# Altium PCB Pannel3.5x3.PcbDoc (part 2 of 4)
Units mil, origin at the board's own origin, x right, y up, seen from the top; angles counter-clockwise.
Board outline 3543.31 x 2771.65 mil, 4 copper layers (SIGNAL, GROUND, PWR, SIGNAL (Bottom)), stack 61.627 mil thick; 234 components, 186 nets, 894 pads, 439 vias.
Unrouted connection lines stored in the file: 4.
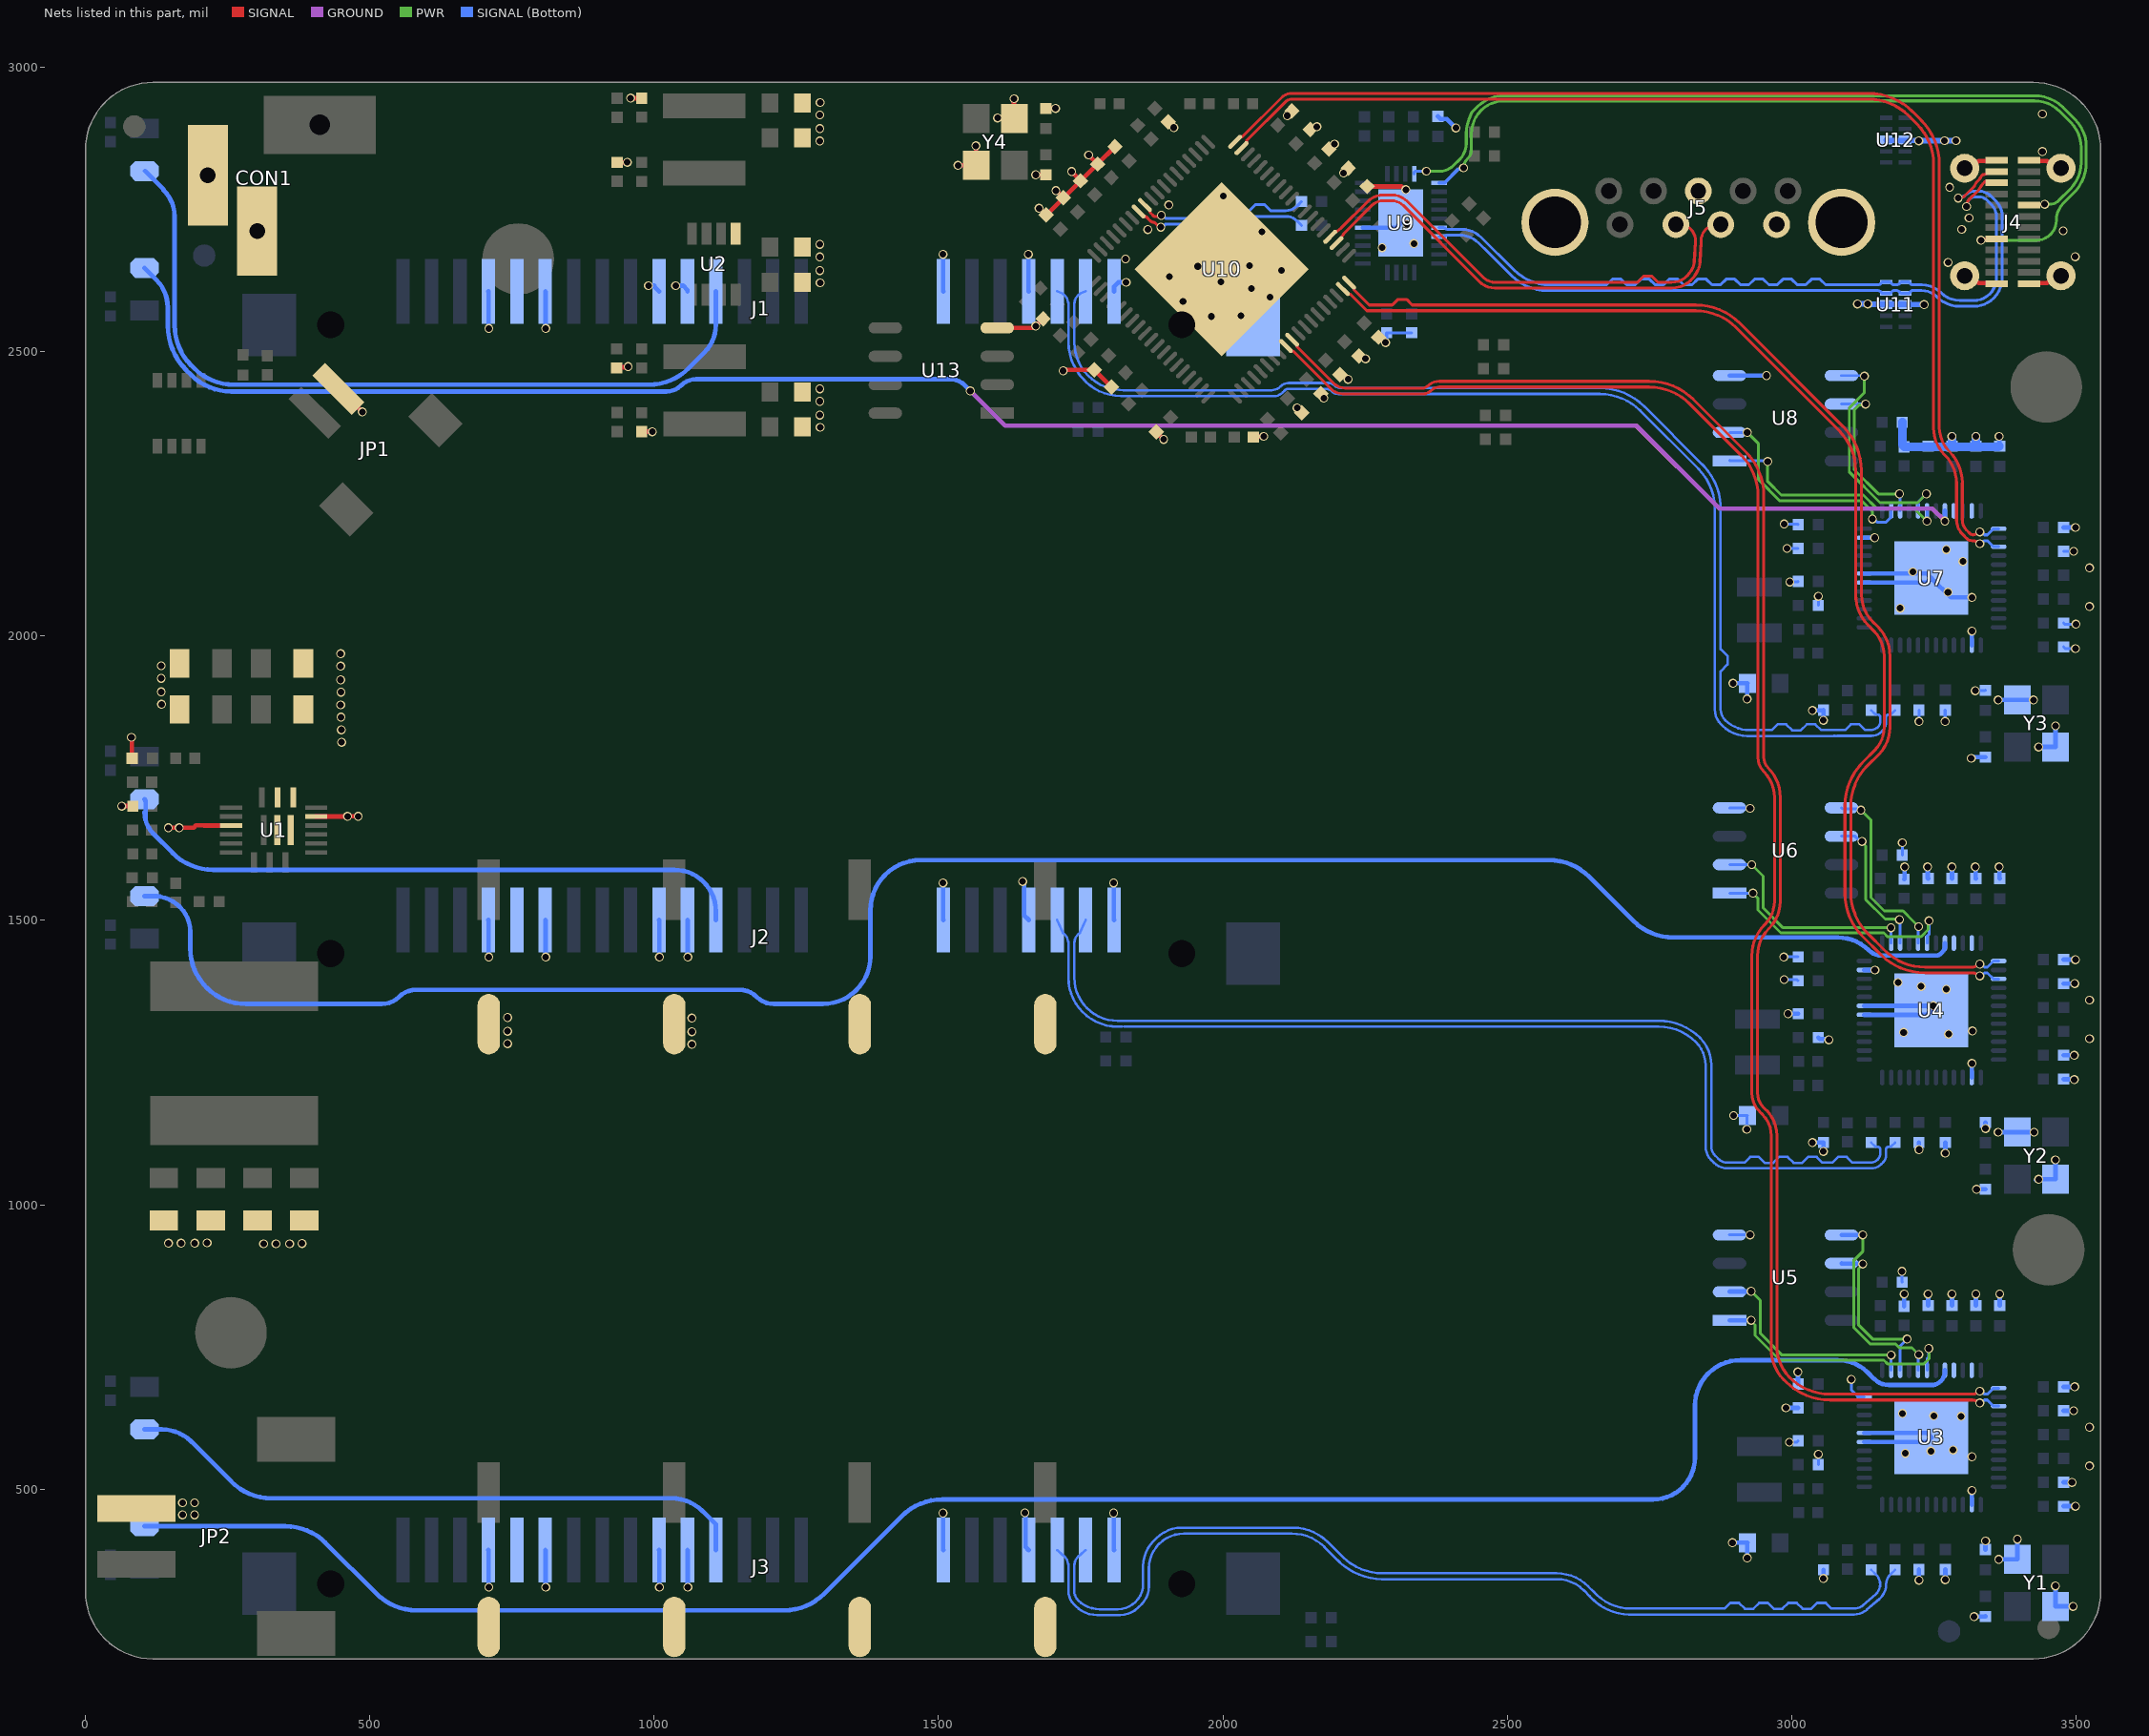
[diagram p4: the nets of this part, all layers, seen from the top]

## Via types
v1: diameter 15.75, hole 11.81, SIGNAL to SIGNAL (Bottom), tented both sides, 439 vias

## Nets (pads, with @x,y where several pads share a name; then routed paths per layer and width w, separated by ;. In a path a pad name is that pad's centre, name@x,y a point inside that pad or via, vN(x,y) a via of type N, cw(c..) or ccw(c..) an arc to the next point about the centre after c; other vN are vias at no path point) (continued)
cap_SSTX_N: C101.2 U10.49 | length 306.6
  SIGNAL w5.1: U10.49@1863.01,2757.78 U10.49@1870.47,2750.33 ; U10.49@1870.48,2750.32 cw(c1867.03,2746.89) 1871.9,2746.89 ccw(c1876.76,2746.89) 1873.31,2743.45 1877.74,2739.03 ; 1877.74,2739.02 ccw(c1881.34,2742.63) 1881.34,2737.53 1883.46,2737.53 1883.62,2737.7 1886.85,2737.7 ccw(c1886.85,2744.65) v1(1891.77,2739.73)
  SIGNAL (Bottom) w5.1: v1(1891.77,2739.73) 1894.37,2739.73 1900.08,2734.03 1959.85,2734.03 ccw(c1959.85,2757.96) 1976.77,2741.04 1976.83,2741.09 cw(c1993.62,2724.3) 1976.87,2741.13 cw(c1993.62,2724.3) 1993.62,2748.05 2032,2748.05 2047,2748.05 2057.93,2758.98 2072.93,2758.98 2083.85,2748.05 2107,2748.05 2110.73,2748.05 ccw(c2110.73,2776.1) 2130.99,2756.71 C101.2@2138.28,2764
cap_SSTX_P: C100.2 U10.50 | length 308.2
  SIGNAL w5.1: U10.50@1851.84,2746.61 1859.3,2739.15 ccw(c1862.74,2742.59) 1862.74,2737.73 cw(c1862.74,2732.86) 1866.17,2736.31 ; 1866.18,2736.3 1872.29,2730.19 ccw(c1875.87,2733.82) 1873.72,2729.2 1874.41,2728.88 cw(c1867.95,2714.87) 1875.89,2728.09 ccw(c1878.47,2732.49) 1876.83,2727.66 1877.5,2727.43 cw(c1877.5,2721.51) 1881.7,2725.7 1886.55,2720.84 ccw(c1891,2725.29) v1(1891,2719)
  SIGNAL (Bottom) w5.1: v1(1891,2719) 1893.88,2719 1898.81,2723.93 1964.03,2723.93 ccw(c1964.03,2747.86) 1980.96,2730.94 1983.91,2733.9 ; 1983.93,2733.91 cw(c1993.7,2724.11) 1993.7,2737.95 2110.73,2737.95 cw(c2110.73,2709.9) C100.2@2130.96,2729.32 ; C100.2@2130.99,2729.29 C100.2@2138.28,2722
cap_TX1_N: C23.1 J3.S3 | length 1734.9
  SIGNAL (Bottom) w4.29: J3.S3@1708.71,392.86 1718.37,384.28 cw(c1704.97,364.86) 1728.56,364.86 1728.56,321.14 ccw(c1762.45,321.14) 1738.43,297.23 1741.47,294.2 ccw(c1778.87,331.61) 1778.87,278.71 1819.59,278.71 ccw(c1819.59,323.09) 1850.97,291.71 1857,297.74 ccw(c1825.62,329.12) 1870,329.12 1870,360.54 cw(c1931.46,360.54) 1887.97,403.97 ; 1888.03,404.03 cw(c1931.46,360.54) 1931.46,422 2120.95,422 cw(c2120.95,339.95) 2178.32,398.61 cw(c2120.95,339.95) 2178.97,397.97 2202.38,374.81 2203.94,373.25 ccw(c2279.74,449.05) 2205.59,371.64 ccw(c2279.74,449.05) 2279.74,341.85 2586.51,341.86 cw(c2586.51,272.51) 2634.99,322.09 cw(c2586.51,272.51) 2635.54,321.55 2645.14,312.06 2651.85,305.35 ccw(c2713.74,367.24) 2654.44,302.86 ccw(c2713.74,367.24) 2713.74,279.71 3110.08,279.71 ccw(c3110.08,313.6) 3132.22,287.95 3154.4,307.09 ccw(c3132.26,332.74) 3166.15,332.74 cw(c3189.74,332.74) 3174.3,350.59 C23.1@3182,358.28
cap_TX1_P: C20.1 J3.S2 | length 1736
  SIGNAL (Bottom) w4.29: J3.S2@1758.71,392.86 1749.04,384.28 ccw(c1762.45,364.86) 1738.85,364.86 1738.85,321.14 ccw(c1762.45,321.14) 1745.73,304.49 ccw(c1783.13,341.9) 1783.13,289 1815.33,289 ccw(c1815.33,333.38) 1846.71,302 ccw(c1815.33,333.38) 1859.71,333.38 1859.71,364.81 cw(c1921.17,364.81) 1877.68,408.23 1883.35,413.91 cw(c1927.74,369.52) 1927.74,432.29 2123.26,432.29 cw(c2123.26,345.54) 2183.15,408.3 cw(c2123.26,345.54) 2184.61,406.88 2186.2,405.28 2209.62,382.12 2210.31,381.43 ccw(c2281.02,452.14) 2211.53,380.24 ccw(c2281.02,452.14) 2281.02,352.14 2586.68,352.14 cw(c2586.68,272.94) 2641.98,329.65 cw(c2586.68,272.94) 2642.69,328.95 2642.77,328.86 2652.37,319.37 2656.11,315.64 ccw(c2718,377.53) 2658.14,313.67 ccw(c2718,377.53) 2718,290 2865,290 2882.43,290 2892.43,300 2907.43,300 2917.86,289.57 2932.86,289.57 2943.28,300 2958.28,300 2968.71,289.57 2983.71,289.57 2994.14,300 3009.14,300 3019.57,289.57 3034.57,289.57 3045,300 3060,300 3070,290 3085,290 3110.08,290 ccw(c3110.08,313.6) 3125.5,295.73 3147.68,314.88 ccw(c3132.26,332.74) C20.1@3147.72,350.57 ; C20.1@3140,358.28 C20.1@3147.7,350.59
cap_TX2_N: C22.1 J2.S3 | length 1832.5
  SIGNAL (Bottom) w4.29: J2.S3@1708.71,1500.84 1718.37,1478.47 cw(c1704.97,1459.05) 1728.56,1459.05 1728.56,1399.4 ccw(c1814.3,1399.4) 1753.67,1338.77 1753.77,1338.67 ccw(c1815.17,1400.07) 1815.17,1313.24 1822.74,1313.24 ; 1826.97,1313.24 2766.23,1313.24 cw(c2766.23,1220.23) 2832,1286 cw(c2791.59,1245.59) 2848.74,1245.59 2848.74,1102.75 ccw(c2882.62,1102.75) 2858.61,1078.84 2863.57,1073.88 ccw(c2887.49,1097.88) 2887.49,1064 3139.27,1064 ccw(c3139.27,1090.8) 3158.23,1071.85 3161.26,1074.88 ccw(c3149.46,1086.67) 3166.15,1086.67 3166.15,1097.58 cw(c3170.44,1097.58) 3167.4,1100.61 cw(c3170.44,1097.58) 3170.44,1101.87 3171.48,1101.87 ccw(c3171.48,1108.68) 3176.29,1103.86 C22.1@3182,1109.57
cap_TX2_P: C19.1 J2.S2 | length 1837.9
  SIGNAL (Bottom) w4.29: J2.S2@1758.71,1500.84 1749.04,1478.47 ccw(c1762.45,1459.05) 1738.85,1459.05 1738.85,1399.47 ccw(c1814.47,1399.47) 1761,1346 ccw(c1815.24,1400.24) 1815.24,1323.53 2766.33,1323.53 cw(c2766.33,1220.48) 2839.2,1293.35 2839.39,1293.17 cw(c2791.96,1245.74) 2859.03,1245.74 2859.03,1102.75 ccw(c2882.62,1102.75) 2865.9,1086.1 2870.84,1081.16 ccw(c2887.49,1097.88) 2887.49,1074.29 2892,1074.29 2917.28,1074.29 2927.28,1084.29 2942.28,1084.29 2952.71,1073.86 2967.71,1073.86 2978.14,1084.29 2993.14,1084.29 3003.57,1073.86 3018.57,1073.86 3029,1084.29 3044,1084.29 3054,1074.29 3072,1074.29 3082,1084.29 3097,1084.29 3107,1074.29 3122,1074.29 3139.23,1074.29 ccw(c3139.23,1090.91) 3150.97,1079.14 3151.06,1079.23 ccw(c3139.49,1090.8) 3155.86,1090.8 3155.86,1097.58 ccw(c3151.56,1097.58) 3154.6,1100.61 ccw(c3151.57,1097.58) 3151.57,1101.87 3150.52,1101.87 cw(c3150.52,1108.68) 3145.71,1103.86 C19.1@3140,1109.57
cap_TX3_N: C21.1 J1.S3 | length 2116.6
  SIGNAL (Bottom) w4.29: J1.S3@1708.71,2606.09 1718.37,2602.1 cw(c1704.97,2582.69) 1728.56,2582.69 1728.56,2516.23 ccw(c1821.13,2516.23) 1755.67,2450.77 1758.74,2447.71 ccw(c1820.88,2509.85) 1820.88,2421.97 2089.96,2421.97 ccw(c2089.96,2443.72) 2105.34,2428.34 2108.35,2431.35 cw(c2116.46,2423.25) 2116.46,2434.71 2181.22,2434.71 cw(c2181.22,2419.35) 2192.08,2430.21 ccw(c2202.94,2441.07) 2202.94,2425.71 2663.07,2425.71 cw(c2663.07,2325.71) 2733.78,2396.42 2835.71,2294.49 cw(c2765,2223.78) 2836.82,2293.36 cw(c2765,2223.78) 2864.11,2237.09 cw(c2765,2223.78) 2865,2223.78 2865,1870.93 ccw(c2901.26,1870.93) 2875.62,1845.28 2878.69,1842.22 ccw(c2921.95,1885.49) 2921.95,1824.3 3074.74,1824.3 3074.94,1824.51 3076.08,1824.51 cw(c3076.05,1820.21) 3076.43,1824.49 3078.09,1824.34 ccw(c3079,1834.59) 3079,1824.3 ccw(c3079,1834.59) 3080.73,1824.45 cw(c3081.44,1820.22) 3081.44,1824.51 3139.51,1824.51 ccw(c3139.51,1852.39) 3139.8,1824.51 ccw(c3139.51,1852.39) 3159.22,1832.67 ; 3159.33,1832.77 ccw(c3142.87,1849.24) 3166.14,1849.24 3166.15,1857.58 cw(c3170.44,1857.58) 3167.4,1860.61 cw(c3170.44,1857.58) 3170.44,1861.87 3171.48,1861.87 ccw(c3171.48,1868.68) 3176.29,1863.86 C21.1@3182,1869.57
cap_TX3_P: C18.1 J1.S2 | length 2118.6
  SIGNAL (Bottom) w4.29: J1.S2@1758.71,2606.09 1749.04,2602.1 ccw(c1762.45,2582.69) 1738.85,2582.69 1738.85,2516.3 ccw(c1821.3,2516.3) 1763,2458 ccw(c1825.14,2520.14) 1803.83,2434.88 ccw(c1825.14,2520.14) 1825.14,2432.26 2085.7,2432.26 ccw(c2085.7,2454.01) 2101.08,2438.63 cw(c2116.42,2423.34) 2101.15,2438.7 cw(c2116.42,2423.34) 2116.42,2445 2185.48,2445 cw(c2185.48,2429.64) 2196.34,2440.5 ccw(c2207.21,2451.36) 2207.21,2436 2663.12,2436 cw(c2663.12,2325.82) 2741.03,2403.73 2843.02,2301.74 ; 2843.04,2301.72 cw(c2765.11,2223.83) 2846.35,2298.26 cw(c2765.11,2223.83) 2874.23,2239.09 cw(c2765.11,2223.83) 2875.29,2223.83 2875.29,2015 2875.29,1977 2887.29,1965 2887.29,1950 2875.29,1938 2875.29,1923 2875.29,1871 ccw(c2901.43,1871) 2882.95,1852.51 ccw(c2926.21,1895.78) 2913.02,1836.03 ccw(c2926.21,1895.78) 2926.21,1834.59 2933,1834.59 2965.32,1834.59 2975.53,1844.8 2990.53,1844.8 3001.16,1834.16 3016.16,1834.16 3026.8,1844.8 3041.8,1844.8 3052,1834.59 3079,1834.59 3079,1834.8 3094.35,1834.8 3104.35,1844.8 3119.35,1844.8 3129.35,1834.8 3139.43,1834.8 ccw(c3139.43,1852.57) 3144.3,1835.47 ccw(c3139.43,1852.57) 3151.79,1839.8 ccw(c3139.43,1852.57) 3152,1840 ccw(c3142.69,1849.31) 3155.86,1849.31 3155.86,1857.58 ccw(c3151.56,1857.58) 3154.6,1860.61 ccw(c3151.57,1857.58) 3151.57,1861.87 3150.52,1861.87 cw(c3150.52,1868.68) 3145.71,1863.86 C18.1@3140,1869.57
DAS1: J3.P11
DAS2: J2.P11
DAS3: J1.P11
GND: C3.1 C4.1 C5.1 C6.1 C7.1 C8.1 C9.1 C10.1 C11.1 C12.1 C13.1 C14.1 C15.1 C16.1 C17.1 C30.1 C31.1 C32.1 C33.1 C34.1 C35.1 C38.1 C39.1 C40.1 C41.1 C42.1 C43.1 C44.1 C45.1 C46.1 C47.1 C48.1 C49.1 C50.1 C51.1 C52.1 C53.1 C54.1 C55.1 C56.1 C57.1 C58.1 C59.1 C60.1 C61.1 C62.1 C63.1 C64.1 C65.1 C70.2 C71.2 C72.2 C73.2 C74.1 C75.1 C76.1 C78.1 C79.1 C80.1 C81.1 C82.1 C83.1 C84.1 C85.1 C86.1 C87.1 C88.1 C89.1 C90.1 C91.1 C94.2 C95.2 C96.1 C97.2 C108.2 C109.2 C110.1 C111.1 C112.1 C113.1 C114.1 C115.1 C116.1 C117.1 C118.1 C119.1 C120.1 C121.1 C122.1 C123.1 C124.1 C125.1 C126.1 CON1.2 CON1.3 E1.2 E2.2 E3.2 E4.2 E5.2 E6.2 E7.2 E8.2 J1.P5 J1.P6 J1.P10 J1.P12 J1.S1 J1.S4 J1.S7 J1.SH1 J2.P5 J2.P6 J2.P10 J2.P12 J2.S1 J2.S4 J2.S7 J3.P5 J3.P6 J3.P10 J3.P12 J3.S1 J3.S4 J3.S7 J4.A1 J4.A12 J4.B1 J4.B12 J4.SH1 J4.SH2 J4.SH3 J4.SH4 J5.4 J5.7 J5.10 J5.11 JP1.2 JP2.2 R7.1 R12.2 R13.2 R16.2 R17.2 R30.1 R31.1 R36.1 R44.2 R46.1 R47.1 R49.2 R53.2 U1.8 U1.10 U1.11 U1.15 U1.20 U1.21 U2.5 U3.26 U3.42 U3.43 U3.47 U3.49 U4.26 U4.42 U4.43 U4.47 U4.49 U5.4 U6.4 U7.26 U7.42 U7.43 U7.47 U7.49 U8.4 U9.19 U9.29 U10.77 U11.3 U11.8 U12.3 U12.8 U13.4 Y1.2 Y1.4 Y2.2 Y2.4 Y3.2 Y3.4 Y4.2 Y4.4 | length 6094.1
  SIGNAL w8: v1(64,1701) R7.1@83.52,1701 ; v1(81,1822) 81.7,1821.3 81.7,1785.7 C11.1@82.41,1785 ; v1(146,1663) 146.13,1662.87 165,1662.87 v1(165.13,1662.74) 165.55,1663.17 190.45,1663.17 194.45,1667.17 208.43,1667.17 208.73,1666.87 U1.15@256.28,1666.87 ; U1.8@405.89,1682.62 405.95,1682.68 460.68,1682.68 v1(461,1683) v1(479.76,1683) ; JP1.2@445.13,2434.63 446.37,2434.63 v1(487,2394) ; R17.2@934,2471.28 935.3,2472.58 952.99,2472.58 v1(954.28,2473.87) ; R16.2@935,2832.99 v1(952.99,2832.99) ; v1(958.73,2945.73) R12.2@978,2945.73 ; R13.2@978,2359.27 v1(996.73,2359.27) ; v1(1534.43,2827.66) Y4.2@1566.54,2827.66 1566,2828.2 v1(1566,2862) ; U13.4@1603.43,2542 1665.9,2542 1668.9,2545 v1(1671,2545) C112.1@1683.95,2557.95 ; v1(1604.03,2911) 1632.8,2911 Y4.4@1633.46,2910.34 1632.89,2910.92 v1(1632.89,2944.67) ; v1(1670.96,2811) C109.2@1689,2811 ; v1(1676.8,2752.18) 1677.31,2752.18 1688.96,2740.53 C116.1@1689.47,2740.53 ccw(c1689.47,2742.94) 1691.18,2741.24 C125.1@1749.97,2800.03 ; C108.2@1689,2927.72 v1(1705.9,2927.72) ccw(c1705.9,2932.1) v1@1709,2929 ; v1(1706.48,2783.05) 1706.72,2783.05 1719.24,2770.53 C115.1@1719.47,2770.53 ; v1(1719.45,2466.38) 1721.55,2466.38 1723.11,2467.95 C120.1@1773.95,2467.95 C97.2@1803.95,2437.95 ; v1(1734.23,2816.61) 1734.23,2816.19 1749.46,2800.96 1749.46,2800.03 C125.1@1749.97,2800.03 ; v1(1764.03,2845.8) 1764.11,2845.8 1779.88,2830.03 R49.2@1779.97,2830.03 ; C114.1@1810.47,2860.53 R49.2@1779.97,2830.03 ; C110.1@1882.95,2358.95 v1(1896,2345.89) ; R53.2@1903.83,2904.17 v1(1914,2894) ; R44.2@2053.73,2350 2054.23,2350.5 2071.5,2350.5 v1(2072,2351) ; v1(2113.49,2914.99) 2113.49,2915.24 2121.53,2923.28 C118.1@2121.53,2923.53 ; v1(2130.65,2401.16) 2130.65,2400.76 2138.53,2392.88 C121.1@2138.53,2392.47 ; C119.1@2153.53,2890.53 2158.37,2890.53 2163.42,2895.57 v1(2165.52,2895.57) ; C126.1@2172.53,2426.47 2172.53,2423.3 v1(2177.56,2418.26) ; C123.1@2186.53,2856.53 2187.16,2856.53 2195.67,2865.04 v1(2196.31,2865.04) ; C117.1@2205.53,2459.47 2210.25,2459.47 2218.3,2451.42 v1(2220.4,2451.42) ; v1@2212.24,2813.24 v1(2212.24,2814.24) C122.1@2220.53,2822.53 ; C124.1@2239.53,2492.47 2243.88,2492.47 2248.92,2487.43 v1(2251.02,2487.43) ; C113.1@2253.53,2790.53 2314.1,2790.53 2319.66,2784.97 v1(2321.76,2784.97) ; J4.SH2@3304.36,2633.51 3316.04,2633.51 3328.97,2620.58 3359.81,2620.58 J4.B1@3360.66,2619.73 ; J4.SH1@3304.36,2822.49 3316.04,2822.49 3328.97,2835.42 3359.81,2835.42 J4.B12@3360.66,2836.27 ; J4.A12@3417.35,2619.73 3418.19,2620.58 3449.03,2620.58 3461.96,2633.51 J4.SH3@3473.65,2633.51 ; J4.A1@3417.35,2836.27 3418.19,2835.42 3449.03,2835.42 3461.96,2822.49 J4.SH4@3473.65,2822.49 ; C125.1@1749.97,2800.03 R49.2@1779.97,2830.03
  SIGNAL (Bottom) w5: U6.4@2890.97,1698 2891.47,1697.5 2926.5,1697.5 v1(2927,1697) ; v1(2986.41,1435.48) 2986.93,1436 C62.1@3011.57,1436 ; v1(2987,1396) 3009.57,1396 C60.1@3011.57,1394
  SIGNAL (Bottom) w5.1: v1(2286.12,2516.05) ccw(c2281.58,2520.59) 2288,2520.59 R46.1@2288,2533.27 R47.1@2332,2533.27 ; U5.4@2890.97,947 v1(2927,947) ; v1(2898,1157) C34.1@2922.46,1157 2921.29,1155.84 v1(2921.29,1132.71) ; v1(2987,2197) 3010.57,2197 C89.1@3011.57,2196 ; v1(2992,2154) C86.1@3011.57,2154 ; v1(2996.24,582.67) 3009.24,582.67 C43.1@3011.57,585 ; v1(2997,2095) 3010.57,2095 C85.1@3011.57,2096 ; C30.1@3047,543 v1(3047,561.28) ; C74.1@3047,2054 v1(3047,2070) ; v1(3105,693) 3105,674.91 3118.05,661.87 U3.47@3127.89,661.87 ; v1(3194,883) 3194,864.72 C58.1@3194.72,864 ; C63.1@3194.72,1615 v1(3194.72,1636.72) ; v1(3224,1850) C78.1@3224,1869.57 ; v1(3270,1850) 3270,1869.34 C83.1@3270.22,1869.57 ; v1(3323,1904) 3340.28,1904 C94.2@3341,1904.72 ; C81.1@3478.27,1981 3481.27,1978 v1(3499,1978) ; C84.1@3478.27,2023 3480.27,2021 v1(3500,2021) ; C82.1@3478.27,2149 v1(3496,2149)
  SIGNAL (Bottom) w8: J3.P12@708.71,392.86 709.06,392.5 709.06,328.05 v1(709.41,327.69) ; J2.P12@708.71,1500.84 709.06,1500.48 709.06,1436.03 v1(709.41,1435.67) ; J1.P12@708.71,2606.09 709.06,2605.74 709.06,2541.28 v1(709.41,2540.93) ; J3.P10@808.71,392.86 809.06,392.5 809.06,328.05 v1(809.41,327.69) ; J2.P10@808.71,1500.84 809.06,1500.48 809.06,1436.03 v1(809.41,1435.67) ; J1.P10@808.71,2606.09 809.06,2605.74 809.06,2541.28 v1(809.41,2540.93) ; v1(990,2616.13) 1000.9,2616.13 1000.9,2613.9 J1.P6@1008.71,2606.09 ; J3.P6@1008.71,392.86 1009.06,392.5 1009.06,328.05 v1(1009.41,327.69) ; J2.P6@1008.71,1500.84 1009.06,1500.48 1009.06,1436.03 v1(1009.41,1435.67) ; v1(1038,2616.12) 1050.9,2616.12 1058.71,2608.31 J1.P5@1058.71,2606.09 ; J3.P5@1058.71,392.86 1059.06,392.5 1059.06,328.05 v1(1059.41,327.69) ; J2.P5@1058.71,1500.84 1059.06,1500.48 1059.06,1436.03 v1(1059.41,1435.67) ; v1(1508,458.02) 1508.35,457.67 1508.35,393.21 J3.S7@1508.71,392.86 ; v1(1508,1566) 1508.35,1565.65 1508.35,1501.19 J2.S7@1508.71,1500.84 ; v1(1508,2671.26) 1508.35,2670.9 1508.35,2606.45 J1.S7@1508.71,2606.09 ; v1(1647.99,1568.49) 1647.99,1566.39 1650.9,1563.49 1650.9,1508.65 J2.S4@1658.71,1500.84 ; v1(1651.9,458.41) 1653.39,456.92 1653.39,398.18 J3.S4@1658.71,392.86 ; v1(1658,2671.26) 1658.35,2670.9 1658.35,2606.45 J1.S4@1658.71,2606.09 ; v1(1808,458.02) 1808.35,457.67 1808.35,393.21 J3.S1@1808.71,392.86 ; v1(1808,1566) 1808.35,1565.65 1808.35,1501.19 J2.S1@1808.71,1500.84 ; J1.S1@1808.71,2606.09 1808.71,2614.19 1816.52,2622 v1(1830,2622) ; U9.19@2246.07,2718.13 2305.13,2718.13 U9.29@2313,2726 ; C96.1@2378,2913.84 2382.58,2909.26 2394.07,2909.26 v1(2409.86,2893.48) ; U8.4@2890.97,2458 v1(2956,2458) ; v1(2896,406) C32.1@2922.46,406 2922,405.54 v1(2922,379) ; v1(2897,1917) C75.1@2922.46,1917 2921.79,1916.33 v1(2921.79,1889.37) ; v1(2990,643) C54.1@3011.57,643 ; v1(2994,1336) C51.1@3011.57,1336 ; v1(3011,706) 3011.28,705.72 3011.28,685.28 C56.1@3011.57,685 ; v1(3036.57,1109.57) C35.1@3056,1109.57 v1(3056,1094) ; v1(3036.81,1869.07) 3037.06,1869.32 3055.75,1869.32 C76.1@3056,1869.57 v1(3056,1852) ; C31.1@3047,1294 3049.52,1291.48 3064.08,1291.48 v1(3065.57,1290) ; v1(3056,343) C33.1@3056,358.28 ; U3.42@3127.89,583.13 3238.13,583.13 U3.49@3246,591 3238.13,598.87 U3.43@3127.89,598.87 ; U4.42@3127.89,1334.13 3238.13,1334.13 U4.49@3246,1342 3238.13,1349.87 U4.43@3127.89,1349.87 ; U4.47@3127.89,1412.87 3127.95,1412.8 3146.27,1412.8 v1(3146.38,1412.69) ; U7.42@3127.89,2094.13 3238.13,2094.13 U7.49@3246,2102 ; U7.43@3127.89,2109.87 3238.13,2109.87 U7.49@3246,2102 ; U7.47@3127.89,2172.87 v1(3146.05,2172.87) v1(3146.05,2172.87) ; R30.1@3198,821.61 v1(3198,843) ; R31.1@3198,1572.61 3198.5,1573.11 3198.5,1593.5 v1(3199,1594) ; v1(3224,340) C42.1@3224,358.57 ; v1(3224,1097) C48.1@3224,1109.57 ; v1(3239,1594) 3239.5,1593.5 3239.5,1574.22 C53.1@3240,1573.72 ; C45.1@3240,822.72 v1(3240,843) ; v1(3270.22,340.78) C41.1@3270.22,358.57 ; v1(3270.22,1090.78) C49.1@3270.22,1109.57 ; C59.1@3282,822.72 v1(3282,843) ; C65.1@3282,1573.72 v1(3282,1594) ; v1(3316,1785) cw(c3321.51,1779.49) 3321.51,1787.28 C95.2@3341,1787.28 ; U7.26@3316.87,1983.89 3316.93,1983.95 3316.93,2008.56 v1(3317.05,2008.68) ; U3.26@3316.93,472.95 v1@3316.93,497.56 ; U4.26@3316.93,1223.95 v1@3316.93,1248.56 ; v1(3317,2068) 3280,2068 U7.49@3246,2102 ; v1(3321,276) 3321.14,276.14 3340.86,276.14 C71.2@3341,276.28 ; v1(3323,1594) 3323.5,1593.5 3323.5,1574.22 C50.1@3324,1573.72 ; C40.1@3324,822.72 v1(3324,843) ; v1(3325.28,1027.28) C73.2@3341,1027.28 ; C70.2@3341,393.72 v1(3341,409) ; v1(3341,1134) C72.2@3341,1144.72 ; v1(3363.32,1127.68) Y2.4@3397,1127.68 v1(3426.43,1127.68) ; v1(3363.32,1887.68) Y3.4@3397,1887.68 v1(3425.32,1887.68) ; v1(3364.32,376.68) Y1.4@3397,376.68 v1(3397,412) ; v1(3365,1594) 3365.5,1593.5 3365.5,1574.22 C61.1@3366,1573.72 ; v1(3365,2351) 3365.5,2350.5 C87.1@3365.5,2334.22 ; C55.1@3366,822.72 v1(3366,843) ; v1@3429.52,1043.52 3433.01,1043.52 v1(3434.5,1045) Y2.2@3463.93,1045 v1(3463.93,1079.07) ; v1@3433,1805 v1(3434.5,1805) Y3.2@3463.93,1805 3464.02,1805.09 v1(3464.02,1842) ; v1(3463.93,330.07) Y1.2@3463.93,294 v1(3495,294) ; C39.1@3478.27,470 v1(3499,470) ; C38.1@3478.27,512 v1(3493,512) ; C44.1@3478.27,638 v1(3496,638) ; C57.1@3478.27,680 v1(3498,680) ; C47.1@3478.27,1221 3478.77,1220.5 3496.5,1220.5 v1(3497,1220) ; C46.1@3478.27,1263 v1(3497,1263) ; C52.1@3478.27,1389 v1(3498,1389) ; C64.1@3478.27,1431 v1(3499,1431) ; C88.1@3478.27,2191 v1(3499,2191)
  SIGNAL (Bottom) w10: v1(3116,2584) v1(3134,2584) 3134.5,2583.5 3166.06,2583.5 U11.8@3166.56,2583 U11.3@3199.44,2583 3199.53,2582.9 3233,2582.9 v1(3233.1,2582.81) ; U12.8@3166.56,2872 3167.19,2871.37 3222.91,2871.37 v1(3223.54,2870.75) 3223.67,2870.87 3268.87,2870.87 v1(3269,2871) v1(3289,2871)
  SIGNAL (Bottom) w15: C90.1@3194.72,2376 3194.72,2340.53 ccw(c3205.93,2340.53) R36.1@3198,2332.61 3361.61,2332.61 ccw(c3361.61,2338.11) C87.1@3365.5,2334.22 ; C91.1@3282,2333.72 v1(3282,2351) ; C80.1@3324,2333.72 v1(3324,2351)
  other v1: 171,455 192,455 171,476 192,476 3317.05,497.68 3524,541 3317,557 3200,563 3245.1,566.95 3284,569 3524,609 3298,628 3250,629 3195,633 313.29,931.47 335.29,931.47 359.29,931.47 146.29,932.47 168.29,932.47 192.29,932.47 381,932 214,933 3317.05,1248.68 1066.53,1282.29 742.53,1283.29 3524,1292 3276,1300 3197,1303 1066.53,1304.29 742.53,1305.29 3317.97,1305.53 1066.53,1328.29 742.53,1329.29 3249,1350 3524,1360 3272,1379 3228,1384 3187,1391 450.53,1813.29 450,1835 449.53,1857.29 449,1879 134,1880 449.53,1901.29 133.47,1901.71 449,1923 133.47,1925.71 449,1947 133.47,1947.71 449,1969 3191,2049 3524,2052 3275,2077 3213,2113 3524,2120 3301.17,2131.07 3272,2152 1292,2367 1291.47,2388.71 1291.47,2412.71 1291.47,2434.71 1980,2562 2032,2563 1930,2588 2083,2596 2050,2611 1292,2621 1997,2623 1906,2632 1291.47,2642.71 2103,2643 1956,2650 2047,2651.63 3275.09,2657 1829,2663 1291.47,2666.71 3498.81,2667 2280,2683 1291.47,2688.71 2336,2690 2069,2711 3477.51,2712.55 1867.95,2714.87 3299,2715 2324,2724 3312.21,2735.08 1905.04,2758.01 2001,2774 3278,2789 3441,2852 1291.47,2870.29 1291.47,2892.29 1291.47,2916.29 3441,2918 1292,2938
GPIO0-A: U3.2 U5.2 | length 391.6
  PWR w5: v1(2929,848) 2945,832 2945,774 2983.19,735.81 v1(3174.95,735.81)
  SIGNAL (Bottom) w5: v1(3174.95,735.81) 3174.95,709.3 U3.2@3175.13,709.11
  SIGNAL (Bottom) w8: U5.2@2890.97,847 2891.47,847.5 2928.5,847.5 v1(2929,848)
GPIO0-B: U4.2 U6.2 | length 389.6
  PWR w5: v1(2930,1598) 2950,1578 2950,1522 2985,1487 v1(3174.76,1487)
  SIGNAL (Bottom) w5: U6.2@2890.97,1598 v1(2930,1598) ; v1(3174.76,1487) 3174.95,1486.81 3174.95,1460.3 U4.2@3175.13,1460.11
GPIO0-C: U7.2 U8.2 | length 409
  PWR w5: v1(2922,2358) 2942,2338 2942,2275 2979,2238 3123.27,2238 3142.13,2219.15 v1(3142.13,2205.87)
  SIGNAL (Bottom) w5: U8.2@2890.97,2358 v1(2922,2358) ; v1(3142.13,2205.87) 3145.03,2205.87 3151.08,2199.83 3165.47,2199.83 3175.13,2209.49 U7.2@3175.13,2220.11
GPIO1-A: U3.3 U5.6 | length 303.3
  PWR w5: v1(3125,896) 3125,894.7 3118,887.7 3118,788.36 3142.36,764 v1(3203.14,764)
  SIGNAL (Bottom) w5: U3.3@3190.88,709.11 3190.88,751.75 v1(3203.14,764)
  SIGNAL (Bottom) w8: U5.6@3087.82,897 3088.32,896.5 3124.5,896.5 v1(3125,896)
GPIO1-B: U4.3 U6.6 | length 260.6
  PWR w5: v1(3124,1639) 3124,1637.07 3130.37,1630.7 3130.37,1536.63 3164.63,1502.37 3188.72,1502.37 v1(3189.76,1501.34)
  SIGNAL (Bottom) w5: U6.6@3087.82,1648 3111.48,1648 3118.42,1641.06 3121.94,1641.06 v1(3124,1639) ; v1(3189.76,1501.34) 3190.88,1500.21 U4.3@3190.88,1460.11
GPIO1-C: U7.3 U8.6 | length 298.5
  PWR w5: v1(3130,2408) 3128.64,2406.64 3119.62,2406.64 3110.42,2397.43 3110.42,2292.31 3152.73,2250 v1(3189.76,2250)
  SIGNAL (Bottom) w5: U8.6@3087.82,2408 v1(3130,2408) ; v1(3189.76,2250) 3190.33,2249.42 3190.33,2220.66 U7.3@3190.88,2220.11
GPIO2-A: U3.5 U5.5 | length 368.7
  PWR w5: v1(3125,947) 3125,917.74 3109,901.74 3109,784.63 3138.63,755 3183,755 3189.37,748.63 3211.64,748.63 v1(3223.57,736.7)
  SIGNAL (Bottom) w5: U3.5@3222.38,709.11 3222.93,709.66 3222.93,736.06 v1(3223.57,736.7)
  SIGNAL (Bottom) w8: U5.5@3087.82,947 v1(3125,947)
GPIO2-B: U4.5 U6.5 | length 331.6
  PWR w5: v1(3122,1694) 3139.37,1676.63 3139.37,1540.35 3163.02,1516.71 3196.12,1516.71 3205.13,1507.71 3205.13,1507.37 v1(3223.5,1489)
  SIGNAL (Bottom) w5: U6.5@3087.82,1698 3089.82,1696 3120,1696 v1(3122,1694) ; U4.5@3222.38,1460.11 3222.93,1460.66 3222.93,1488.42 v1(3223.5,1489)
GPIO2-C: U7.5 U8.5 | length 420.3
  PWR w5: v1(3128,2457) 3128,2427.74 3101.42,2401.16 3101.42,2392.14 3101.42,2288.58 3155.37,2234.63 3221.63,2234.63 v1(3237,2250)
  SIGNAL (Bottom) w5: U8.5@3087.82,2458 3127,2458 v1(3128,2457) ; U7.5@3222.38,2220.11 3222.75,2220.48 3222.75,2235.75 v1(3237,2250)
GPIO3-A: U3.6 U5.1 | length 455.5
  PWR w5: v1(2929,797) 2929,795.7 2936,788.7 2936,770.27 2979.46,726.81 3162.2,726.81 3168.58,720.44 3232.7,720.44 3241.77,729.51 3241.77,746.97 v1(3241.35,747.38)
  SIGNAL (Bottom) w5: U3.6@3238.13,709.11 3238.68,709.66 3238.68,730.07 3240.62,732.01 3240.62,746.65 v1(3241.35,747.38)
  SIGNAL (Bottom) w8: U5.1@2890.97,797 v1(2929,797)
GPIO3-B: U4.6 U6.1 | length 454.7
  PWR w5: v1(2932,1548) 2941,1539 2941,1518.27 2981.27,1478 3162.02,1478 3168.39,1471.63 3227.87,1471.63 3240.21,1483.96 3240.21,1498.06 v1(3241.49,1499.34)
  SIGNAL (Bottom) w5: U6.1@2890.97,1548 v1(2932,1548) ; U4.6@3238.13,1460.11 3238.68,1460.66 3238.68,1472.53 3241.49,1475.35 v1(3241.49,1499.34)
GPIO3-C: U7.6 U8.1 | length 431.5
  PWR w5: v1(2958,2307) 2958,2271.73 2981.73,2248 3126,2248 3150,2224 3216.07,2224 v1(3238.13,2201.95)
  SIGNAL (Bottom) w5: U8.1@2890.97,2308 2890.97,2309.11 2892.07,2308 2957,2308 v1(2958,2307) ; v1(3238.13,2201.95) U7.6@3238.13,2220.11
GPIO4-A: LED4.2 U3.8 | length 3498.6
  SIGNAL (Bottom) w8: LED4.2@104,434.86 351.72,434.86 cw(c351.72,334.86) 422.43,405.57 511.71,316.29 ccw(c582.42,387) 582.42,287 1228.58,287 ccw(c1228.58,387) 1299.29,316.29 1435.71,452.71 cw(c1506.42,382) 1506.42,482 2756.59,482 ccw(c2756.59,555.41) 2808.5,503.5 ccw(c2756.59,555.41) 2830,555.41 2830,646.77 cw(c2910.23,646.77) 2853.48,703.48 cw(c2910.23,646.77) 2910.23,727 3080.89,727 cw(c3080.89,651.89) 3134,705 3145,694 ; 3145.03,693.97 ccw(c3171.56,720.56) 3171.56,683 3245.41,683 ccw(c3245.41,707.21) 3262.53,690.09 ccw(c3245.41,707.21) 3269.62,707.21 U3.8@3269.62,709.11
GPIO4-B: LED6.2 U4.8 | length 3548.9
  SIGNAL (Bottom) w8: LED6.2@104,1542.84 119.83,1542.84 cw(c119.83,1477.05) 132.07,1541.69 cw(c119.83,1477.05) 166.35,1523.57 cw(c122.6,1479.82) 184.47,1479.82 184.47,1451.21 ccw(c282.68,1451.21) 213.23,1381.77 ccw(c282.68,1451.21) 282.68,1353 521.32,1353 ccw(c521.32,1395.68) 551.5,1365.5 cw(c581.68,1335.32) 581.68,1378 1150.32,1378 cw(c1150.32,1335.32) 1180.5,1365.5 ccw(c1210.68,1395.68) 1210.68,1353 1296.23,1353 ccw(c1296.23,1437.19) 1355.76,1377.66 ccw(c1296.23,1437.19) 1380.42,1437.19 1380.42,1517.95 cw(c1468.47,1517.95) 1406.17,1580.17 cw(c1468.47,1517.95) 1406.21,1580.21 cw(c1468.47,1517.95) 1406.25,1580.25 cw(c1468.47,1517.95) 1468.47,1606 2573.58,1606 cw(c2573.58,1506) 2644.29,1576.71 2721.71,1499.29 ccw(c2792.42,1570) 2792.42,1470 3081.57,1470 cw(c3081.57,1393.57) 3135.61,1447.61 ; 3135.63,1447.6 ccw(c3158.03,1470.03) 3158.03,1438.33 3245,1438.33 3252.16,1438.39 cw(c3252.27,1430.4) 3252.88,1438.37 ccw(c3253.87,1450.27) 3253.87,1438.33 ccw(c3253.87,1450.27) 3262.29,1441.8 ccw(c3253.87,1450.27) 3262.34,1441.85 ; 3262.36,1441.88 3265.81,1445.32 ccw(c3256.6,1454.53) 3269.62,1454.53 U4.8@3269.62,1460.11
GPIO4-C: LED8.2 U7.8 | length 3433.1
  GROUND w8: v1(1556,2431) 1617,2370 2727,2370 2873,2224 3247.57,2224 v1(3269.62,2201.95)
  SIGNAL (Bottom) w8: LED8.2@104,2647.3 124.5,2626.8 cw(c75.01,2577.31) 124.54,2626.77 cw(c75.01,2577.31) 145,2577.31 145,2546.42 ccw(c257,2546.42) 177.71,2467.32 185.74,2459.29 ccw(c256.45,2530) 256.45,2430 1021.71,2430 ccw(c1021.71,2466.84) 1047.76,2440.79 cw(c1073.81,2414.74) 1073.81,2451.58 1520.86,2451.58 cw(c1520.86,2416.45) 1545.71,2441.29 v1(1556,2431) ; v1@3269.62,2200.38 v1(3269.62,2201.95) U7.8@3269.62,2220.11
GPIO5-A: U3.9
GPIO5-B: U4.9
GPIO5-C: U7.9
GPIO6-A: U3.11
GPIO6-B: U4.11
GPIO6-C: U7.11
HOT1: J3.P4 LED3.2 | length 1108.3
  SIGNAL (Bottom) w8: LED3.2@104.01,605.15 134.43,605.15 cw(c134.43,531.71) 186.34,583.66 256.71,513.29 ccw(c327.42,584) 327.42,484 1030.41,484 cw(c1030.41,405.7) 1085.74,461.1 ; 1085.77,461.07 1108.71,438.13 J3.P4@1108.71,392.86
HOT2: J2.P4 LED5.2 | length 1143.7
  SIGNAL (Bottom) w8: 104.01,1690.56 ccw(c158.49,1690.56) 119.94,1652.06 153.71,1618.29 ccw(c224.42,1689) 224.42,1589 1035.49,1589 cw(c1035.49,1515.79) 1087.26,1567.56 cw(c1035.49,1515.79) 1108.71,1515.79 J2.P4@1108.71,1500.84 ; LED5.2@104.01,1713.13 cw(c99.19,1708.32) 106,1708.32 106,1680
HOT3: J1.P4 LED7.2 | length 1412.2
  SIGNAL (Bottom) w8: LED7.2@105.1,2817.6 137.03,2785.67 cw(c135.16,2783.81) 137.8,2783.81 cw(c91.45,2737.45) 137.84,2783.77 cw(c91.45,2737.45) 157,2737.45 157,2546.42 ccw(c257,2546.42) 186.29,2475.71 190.71,2471.29 ccw(c261.42,2542) 261.42,2442 990.58,2442 ccw(c990.58,2542) 1061.29,2471.29 1087.99,2497.99 ccw(c1037.99,2548) 1108.71,2548 J1.P4@1108.71,2606.09
HSD1_N: U3.13 U10.10 | length 2937.4
  SIGNAL w5.1: U10.10@2121.89,2521.11 2130.77,2512.23 2130.77,2508.27 2194.58,2444.46 ccw(c2215,2464.87) 2215,2436 2352.01,2436 ccw(c2352.01,2446.39) 2359.36,2439.04 cw(c2380.88,2417.52) 2380.88,2447.96 2749.99,2447.96 cw(c2749.99,2338.18) 2827.61,2415.8 2919.02,2324.4 cw(c2841.39,2246.77) 2951.17,2246.77 2951.17,1786.2 ccw(c2976.21,1786.2) 2958.51,1768.49 cw(c2906.38,1716.36) 2980.1,1716.36 2980.1,1533.99 cw(c2912.08,1533.99) 2960.18,1485.9 2960.12,1485.84 ccw(c3008.36,1437.6) 2940.14,1437.6 2940.14,1196.74 ccw(c2976.06,1196.74) 2950.66,1171.34 2955.98,1166.02 cw(c2911.93,1121.96) 2974.23,1121.96 2974.23,750.91 ccw(c3051.6,750.91) 2996.89,696.21 ccw(c3067.61,766.92) 3067.61,666.92 3318.15,666.92 ccw(c3318.15,678.14) v1@3326.07,670.19 ; v1@3326.08,670.2 cw(c3331,665.28) v1(3331,672.24)
  SIGNAL (Bottom) w5.1: v1(3331,672.24) 3333.88,672.24 3339.21,666.92 3344.32,666.92 3355.02,677.61 U3.13@3364.11,677.61
HSD1_P: U3.15 U10.9 | length 2946.2
  SIGNAL w5.1: U10.9@2110.78,2510.01 2119.67,2501.13 2123.63,2501.13 2168.88,2455.88 2190.4,2434.36 ccw(c2210.82,2454.77) 2210.82,2425.9 2352.05,2425.9 ccw(c2352.05,2446.28) 2366.47,2431.87 ; 2366.48,2431.88 cw(c2380.91,2417.44) 2380.91,2437.86 2749.85,2437.86 cw(c2749.85,2337.86) 2820.56,2408.57 2911.78,2317.35 cw(c2841.07,2246.64) 2941.07,2246.64 2941.07,1786.03 ccw(c2975.8,1786.03) 2951.24,1761.47 cw(c2905.96,1716.19) 2951.28,1761.44 cw(c2905.96,1716.19) 2970,1716.19 2970,1534.11 cw(c2911.8,1534.11) 2952.95,1492.95 ccw(c3008.26,1437.64) 2952.87,1492.87 ccw(c3008.26,1437.64) 2930.04,1437.77 ccw(c3008.26,1437.64) 2930.04,1437.64 2930.04,1196.68 ccw(c2975.92,1196.68) 2943.46,1164.26 ; 2943.48,1164.24 2948.78,1158.94 ; 2948.81,1158.9 cw(c2911.72,1121.87) 2964.13,1121.87 2964.13,746.73 ccw(c3041.5,746.73) 2986.79,692.02 2989.78,689.04 ccw(c3067.57,766.83) 2989.84,688.98 ccw(c3067.57,766.83) 3067.57,656.82 3318.15,656.82 cw(c3318.15,645.6) v1@3326.07,653.54 ; v1@3326.08,653.53 ccw(c3331,658.45) v1(3331,651.49)
  SIGNAL (Bottom) w5.1: v1(3331,651.49) 3333.88,651.49 3339.21,656.82 3344.32,656.82 3355.02,646.12 U3.15@3364.11,646.12
HSD2_N: U4.13 U10.19 | length 2181.8
  SIGNAL w5.1: U10.19@2222.08,2621.31 2230.96,2612.43 2230.96,2608.47 2257.33,2582.1 2283,2582.1 2298,2582.1 2308,2592.1 2323,2592.1 2333,2582.1 2380,2582.1 2831.57,2582.1 cw(c2831.57,2472.44) 2909.12,2549.98 3090.63,2368.46 cw(c3013.01,2290.84) 3122.79,2290.84 3122.79,2073.09 ccw(c3190.09,2073.09) 3142.48,2025.52 3151.58,2016.42 cw(c3099.98,1964.81) 3172.96,1964.81 3172.96,1839.6 cw(c3105.54,1839.6) 3153.21,1791.93 3133.29,1772.01 ccw(c3204,1701.3) 3104,1701.3 3104,1548.42 ccw(c3204,1548.42) 3133.29,1477.71 3163.79,1447.21 ccw(c3234.51,1517.92) 3234.51,1417.92 3318.15,1417.92 ccw(c3318.15,1429.14) v1@3326.07,1421.19 ; v1@3326.08,1421.2 cw(c3331,1416.28) v1(3331,1423.24)
  SIGNAL (Bottom) w5.1: v1(3331,1423.24) 3333.88,1423.24 3339.21,1417.92 3344.32,1417.92 3355.02,1428.61 U4.13@3364.11,1428.61
HSD2_P: U4.15 U10.18 | length 2182
  SIGNAL w5.1: U10.18@2210.98,2610.21 2219.86,2601.33 2223.82,2601.33 2253.15,2572 2831.39,2572 cw(c2831.39,2472) 2902.1,2542.71 3083.4,2361.42 cw(c3012.69,2290.71) 3112.69,2290.71 3112.69,2073.01 ccw(c3189.88,2073.01) 3135.24,2018.48 ccw(c3189.88,2073.01) 3135.3,2018.42 3144.33,2009.39 cw(c3099.6,1964.65) 3162.86,1964.65 3162.86,1839.72 cw(c3105.24,1839.72) 3146,1799 3126.11,1779.11 ccw(c3203.87,1701.35) 3093.9,1701.35 3093.9,1547.21 ccw(c3201.07,1547.21) 3125.25,1471.47 3156.68,1440.04 ccw(c3234.47,1517.83) 3234.47,1407.82 3318.15,1407.82 cw(c3318.15,1396.6) v1@3326.07,1404.54 ; v1@3326.08,1404.53 ccw(c3331,1409.45) v1(3331,1402.49)
  SIGNAL (Bottom) w5.1: v1(3331,1402.49) 3333.88,1402.49 3339.21,1407.82 3344.32,1407.82 3355.02,1397.12 U4.15@3364.11,1397.12
HSD3_N: J5.2 U10.23 | length 844.2
  SIGNAL w5.1: U10.23@2188.71,2702.06 2197.06,2710.41 ccw(c2187.84,2736.91) 2207.68,2717.07 cw(c2234.65,2690.1) 2207.72,2717.12 2254.88,2764.27 cw(c2281.81,2737.26) 2281.81,2775.41 2297.39,2775.41 cw(c2297.39,2737.26) 2324.28,2764.32 2458.41,2630.18 ccw(c2478.21,2650.05) 2478.21,2622 2714.09,2622 2729.09,2622 2739.54,2632.46 2754.54,2632.46 2765,2622 2780,2622 2789.44,2622 ccw(c2789.44,2659.56) 2816,2633 ccw(c2779.91,2669.09) 2826.07,2647.32 ccw(c2800.89,2659.67) 2826.32,2647.83 2826.35,2647.9 ccw(c2800.89,2659.68) 2828.9,2658.11 2830.91,2693.88 ccw(c2802.9,2695.45) 2802.9,2723.5 J5.2@2796.6,2723.5
HSD3_P: J5.3 U10.22 | length 843.5
  SIGNAL w5.1: U10.22@2199.81,2690.96 2208.16,2699.31 cw(c2234.65,2690.1) 2214.82,2709.93 ; 2214.86,2709.97 2262.01,2757.13 cw(c2281.81,2737.26) 2281.81,2765.31 2297.39,2765.31 cw(c2297.39,2737.26) 2317.16,2757.15 2451.28,2623.03 ccw(c2478.21,2650.05) 2478.21,2611.9 2789.5,2611.9 ccw(c2789.5,2659.43) 2823.1,2625.82 2823.17,2625.88 ccw(c2780,2669.05) 2835.22,2643.01 2835.24,2643.07 2835.51,2643.66 ccw(c2800.89,2659.68) 2838.98,2657.54 2840.99,2693.26 ccw(c2802.9,2695.45) 2841.05,2695.45 cw(c2869.1,2695.45) 2869.1,2723.5 J5.3@2875.4,2723.5
HSD4_N: U7.13 U10.38 | length 2064.9
  SIGNAL w5.1: U10.38@2021.69,2869.08 2030.57,2877.96 2034.53,2877.96 2103.03,2946.46 ; 2103.05,2946.49 cw(c2121.46,2928.02) 2121.46,2954.1 3135.5,2954.1 cw(c3135.5,2844.44) 3213.04,2921.98 3227.51,2907.51 cw(c3149.89,2829.88) 3255.28,2860.6 cw(c3149.89,2829.88) 3259.67,2829.88 3259.67,2367.01 ccw(c3319.25,2367.01) 3277.12,2324.88 cw(c3221.42,2269.18) 3300.19,2269.18 3300.19,2204.65 ccw(c3326.92,2204.65) 3308,2185.77 3313.39,2180.37 ccw(c3319.32,2186.3) 3319.32,2177.92 ccw(c3319.32,2186.3) 3325.25,2180.37 3326.08,2181.2 cw(c3331,2176.28) v1(3331,2183.24)
  SIGNAL (Bottom) w5.1: v1(3331,2183.24) 3333.88,2183.24 3339.21,2177.92 3344.32,2177.92 3355.02,2188.61 U7.13@3364.11,2188.61
HSD4_P: U7.15 U10.37 | length 2057.2
  SIGNAL w5.1: U10.37@2032.79,2857.98 2041.67,2866.86 2041.67,2870.82 2110.12,2939.27 cw(c2121.53,2927.87) 2121.53,2944 3135.32,2944 cw(c3135.32,2844) 3206.03,2914.71 3220.28,2900.46 cw(c3149.57,2829.75) 3245.06,2859.44 cw(c3149.57,2829.75) 3249.57,2829.75 3249.57,2366.22 ccw(c3317.33,2366.22) 3269.35,2318.36 ccw(c3317.33,2366.22) 3269.41,2318.3 cw(c3219.5,2268.39) 3290.09,2268.39 3290.09,2204.58 ccw(c3326.75,2204.58) 3300.81,2178.67 ; 3300.83,2178.65 3307.73,2171.75 ccw(c3317.23,2181.25) 3317.23,2167.82 3319.03,2167.82 cw(c3319.03,2158.73) 3325.44,2165.17 3326.08,2164.53 ccw(c3331,2169.45) v1(3331,2162.49)
  SIGNAL (Bottom) w5.1: v1(3331,2162.49) 3333.88,2162.49 3339.21,2167.82 3344.32,2167.82 3355.02,2157.12 U7.15@3364.11,2157.12
IN_CC1: J4.A5 U9.1 | length 1428.5
  SIGNAL w5.1: J4.A5@3417.35,2757.53 3418.14,2758.33 3444.2,2758.33 v1(3445,2759.12)
  PWR w5.1: v1(2423.34,2823.26) cw(c2444.93,2823.26) 2424.74,2830.92 cw(c2444.93,2823.26) 2429.66,2838.53 2430.95,2839.82 ccw(c2415.97,2854.79) 2437.15,2854.79 2437.15,2883.44 cw(c2494.71,2883.44) 2454.01,2924.14 cw(c2494.71,2883.44) 2494.71,2941 3426.74,2941 cw(c3426.74,2877.3) 3471.76,2922.37 ; v1(3445,2759.12) 3454.13,2759.12 ccw(c3454.13,2781.15) 3469.71,2765.58 3489.35,2785.22 ccw(c3441.92,2832.65) 3509,2832.65 3509,2858.89 ccw(c3445.66,2858.89) 3490.47,2903.66 ; 3471.79,2922.34 3490.45,2903.68
  SIGNAL (Bottom) w6: U9.1@2379.93,2796.86 2389.77,2796.86 2414.31,2821.4 2421.47,2821.4 v1(2423.34,2823.26)
IN_CC2: J4.B5 U9.28 | length 1642.6
  SIGNAL w5.1: v1(3333.01,2696.06) 3334.22,2697.27 3359.45,2697.27 J4.B5@3360.66,2698.47
  PWR w5.1: v1(2357.67,2817.21) 2380.85,2817.21 ccw(c2380.85,2852.51) 2405.8,2827.54 2416.15,2837.89 ccw(c2387.43,2866.61) 2428.05,2866.61 2428.05,2883.44 cw(c2494.71,2883.44) 2432.75,2908.03 2437.81,2920.81 2447.58,2930.58 ; v1(3333.01,2696.06) 3430.97,2696.06 ccw(c3430.97,2730.53) 3455.35,2706.16 3455.91,2706.72 ; 3455.92,2706.74 ccw(c3445,2717.63) 3456.78,2707.66 3457.29,2708.27 ccw(c3430.97,2730.53) 3465.44,2730.53 cw(c3508.68,2730.53) 3478.11,2761.1 3498.1,2781.1 3500.21,2783.61 ccw(c3441.92,2832.65) 3518.1,2832.65 3518.1,2860.78 ccw(c3450.21,2860.78) 3498.21,2908.79 3477.56,2929.44 3476.98,2929.99 ccw(c3426.74,2877.3) 3426.74,2950.1 2494.71,2950.1 ccw(c2494.71,2883.44) 2447.61,2930.61 ; 2447.61,2930.61 ccw(c2494.71,2883.44) 2447.58,2930.58
  SIGNAL (Bottom) w5.1: U9.28@2336.63,2812.62 2336.63,2815.83 2338.02,2817.21 v1(2357.67,2817.21)
IN_SSRX1_N: J4.B11 U9.7 U11.2 U11.9 | length 1369.2
  SIGNAL w5.1: v1(3293,2770) 3301.7,2772.19 ccw(c3300.46,2777.14) 3304.06,2773.53 ; 3304.09,2773.56 3320.55,2790.02 ; 3320.56,2790.03 ccw(c3316.92,2793.61) 3321.23,2790.88 3325.58,2797.75 cw(c3338.42,2789.62) 3327.38,2800.07 ; 3327.41,2800.1 ccw(c3304.36,2822.49) 3330.81,2804.24 3334.5,2809.59 cw(c3338.7,2806.69) 3338.7,2811.79 ccw(c3338.7,2819.97) 3344.48,2814.18 cw(c3350.26,2808.4) 3350.26,2816.58 J4.B11@3360.66,2816.58
  SIGNAL (Bottom) w5.1: U9.7@2379.93,2702.37 2387.78,2702.37 ccw(c2387.78,2707.19) 2391.19,2703.78 cw(c2394.6,2700.37) 2394.6,2705.2 2415.2,2705.2 cw(c2415.2,2655.45) 2450.37,2690.63 ; 2450.38,2690.63 2465.56,2675.44 2507.15,2633.85 ccw(c2570.82,2697.51) 2570.82,2607.48 3150.78,2607.48 cw(c3150.78,2597.28) 3157.99,2604.49 3157.99,2604.07 3158.68,2603.38 ccw(c3160.36,2605.05) 3160.36,2602.68 U11.9@3166.56,2602.68 3171.79,2602.68 ccw(c3171.79,2607.42) 3175.13,2604.07 3175.14,2604.49 3176.63,2605.98 cw(c3180.24,2602.38) 3180.24,2607.48 3183.65,2607.48 cw(c3183.65,2597.28) 3190.86,2604.49 3190.86,2604.07 3191.56,2603.38 ccw(c3193.23,2605.05) 3193.23,2602.68 U11.2@3199.44,2602.68 3204.66,2602.68 ccw(c3204.66,2607.42) 3208,2604.07 3208.01,2604.49 3209.5,2605.98 cw(c3213.11,2602.38) 3213.11,2607.48 3228.82,2607.48 cw(c3228.82,2569.56) 3255.62,2596.38 ; 3255.66,2596.34 ccw(c3295.39,2636.14) 3295.39,2579.9 3320.7,2579.9 ccw(c3320.7,2629.36) 3355.67,2594.39 3355.82,2594.53 ccw(c3320.82,2629.52) 3370.31,2629.03 ccw(c3320.82,2629.52) 3370.31,2629.52 3370.31,2737.91 ccw(c3331.77,2737.91) 3359.02,2765.16 3350.57,2773.61 ; v1(3293,2770) cw(c3297.92,2765.08) 3297.92,2772.04 ccw(c3297.92,2783.26) 3305.85,2775.32 3305.9,2775.37 cw(c3322.1,2759.17) 3305.94,2775.41 cw(c3322.1,2759.17) 3322.1,2782.08 3330.11,2782.08 cw(c3330.11,2753.15) 3350.57,2773.61
IN_SSRX1_P: J4.B10 U9.6 U11.1 U11.10 | length 1368.1
  SIGNAL w5.1: v1(3307.67,2755.33) 3309.87,2764.03 cw(c3314.81,2762.79) 3311.21,2766.39 3327.71,2782.89 ccw(c3316.92,2793.61) 3329.77,2785.48 3334.12,2792.35 cw(c3338.42,2789.62) 3334.7,2793.1 ; 3334.73,2793.14 ccw(c3304.36,2822.49) 3338.34,2797.41 cw(c3342.43,2794.36) 3342.43,2799.46 3343.52,2799.46 J4.B10@3344.13,2799.65
  SIGNAL (Bottom) w5.1: U9.6@2379.93,2718.12 2387.78,2718.12 cw(c2387.78,2713.3) 2391.19,2716.71 ccw(c2394.6,2720.12) 2394.6,2715.3 2419.38,2715.3 cw(c2419.38,2665.55) 2454.56,2700.73 2511.34,2643.95 ccw(c2575,2707.61) 2575,2617.58 2660,2617.58 2675,2617.58 2685,2627.58 2700,2627.58 2710,2617.58 2725,2617.58 2735,2627.58 2750,2627.58 2760,2617.58 2775,2617.58 2785,2627.58 2800,2627.58 2810,2617.58 2825,2617.58 2835,2627.58 2850,2627.58 2860,2617.58 2875,2617.58 2885,2627.58 2900,2627.58 2910,2617.58 2925,2617.58 2935,2627.58 2950,2627.58 2960,2617.58 2975,2617.58 2985,2627.58 3000,2627.58 3010,2617.58 3025,2617.58 3035,2627.58 3050,2627.58 3060,2617.58 3122,2617.58 3150.78,2617.58 ccw(c3150.78,2627.78) 3157.99,2620.56 3157.99,2620.98 3158.68,2621.68 cw(c3160.36,2620) 3160.36,2622.37 U11.10@3166.56,2622.37 3171.79,2622.37 cw(c3171.79,2617.63) 3175.13,2620.99 3175.14,2620.57 3176.63,2619.07 ccw(c3180.24,2622.68) 3180.24,2617.58 3183.65,2617.58 ccw(c3183.65,2627.78) 3190.86,2620.56 3190.86,2620.98 3191.56,2621.68 cw(c3193.23,2620) 3193.23,2622.37 U11.1@3199.44,2622.37 3204.66,2622.37 cw(c3204.66,2617.63) 3208,2620.99 3208.01,2620.57 3209.5,2619.07 ccw(c3213.11,2622.68) 3213.11,2617.58 3228.95,2617.58 cw(c3228.95,2569.88) 3262.68,2603.61 ccw(c3295.53,2636.46) 3295.53,2590 3320.59,2590 ccw(c3320.59,2629.62) 3348.58,2601.58 ccw(c3320.59,2629.62) 3360.21,2629.62 3360.21,2737.86 ccw(c3331.65,2737.86) 3351.85,2758.05 3343.48,2766.42 ccw(c3330.04,2752.98) 3330.04,2771.98 3322.17,2771.98 ccw(c3322.17,2759) 3313,2768.18 ccw(c3320.93,2760.25) 3309.71,2760.25 cw(c3302.75,2760.25) v1(3307.67,2755.33)